# EAGLE board KombyPiMini (EAGLE 7.2.0)
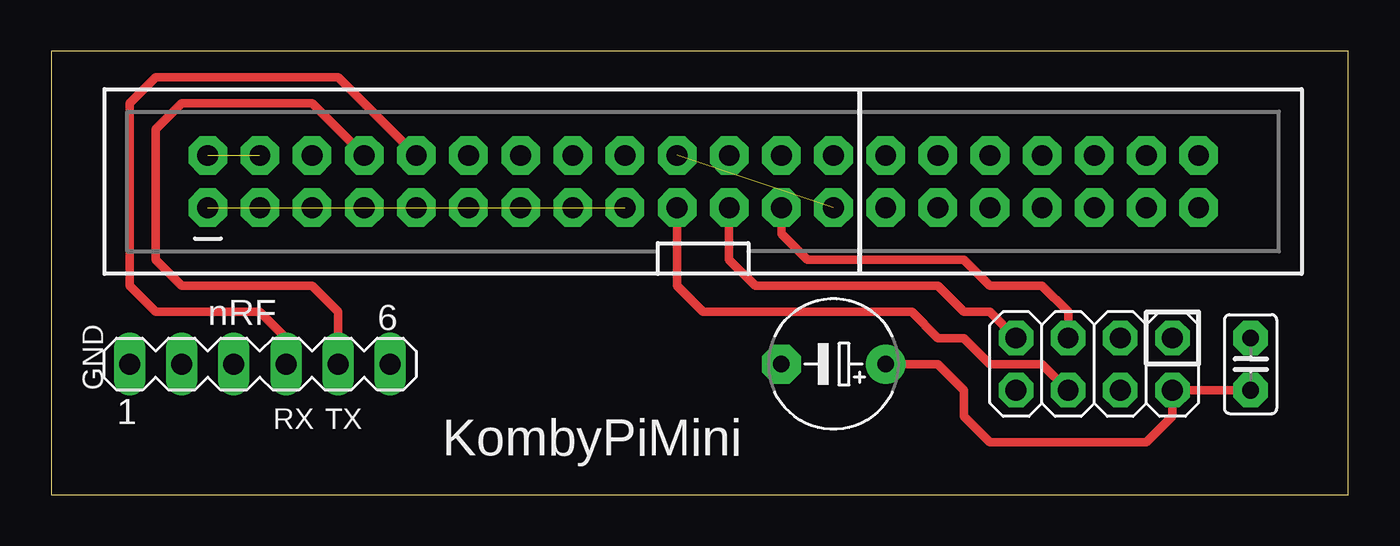
[diagram p0: board, top side]
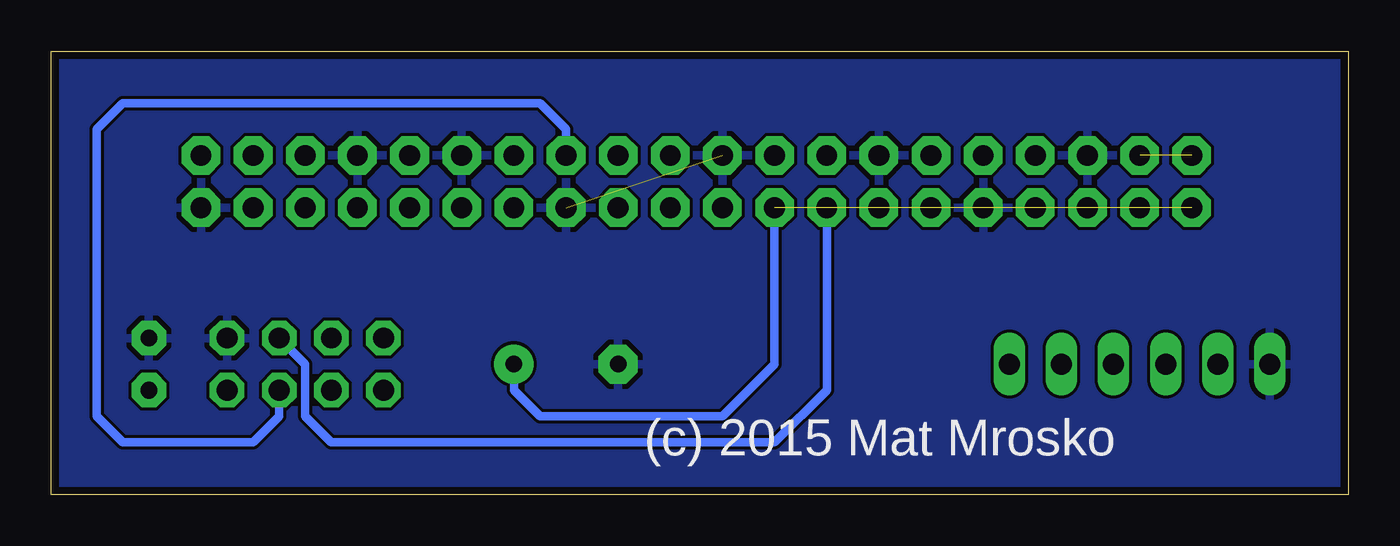
[diagram p1: board, bottom side, seen from below]

Size 63.17 x 21.58 mm. Coordinates in mm from the lower left corner, seen from the top.
Outline: 0,0 63.17,0 63.17,21.58 0,21.58 0,0
Copper layers (1*16): Top 0.0356mm / dielectric 1.5011mm / Bottom 0.0356mm
Design rules "oshpark": minimum track width 6mil, minimum drill 13mil, track to track 6mil, track to pad 6mil, pad to pad 6mil, via to via 6mil, smd to smd 6mil, copper to edge 15mil, drill to drill 6mil, minimum pad ring 7mil, minimum via ring 7mil, stop-mask expansion 4mil, vias tented up to drill 0mil, thermal gap 10mil
Net classes: 1 RFBoard: width 0.406 mm

## Footprints (pad centres in the part's own frame; a part is rotated, then mirrored left to right if it is on the bottom)
C025-025X050 = drill 0.813 pad 1.676 octagon: 1 -1.27,0; 2 1.27,0
E5-6 = drill 0.813 pad 1.905: + -2.54,0 | drill 0.813 pad 1.905 octagon: - 2.54,0
MA06-1 = drill 1.016 long: 1 -6.35,0; 2 -3.81,0; 3 -1.27,0; 4 1.27,0; 5 3.81,0; 6 6.35,0
2X20-SHROUDED = drill 1.016 pad 1.88 octagon: 1 -1.27,24.13; 2 1.27,24.13; 3 -1.27,21.59; 4 1.27,21.59; 5 -1.27,19.05; 6 1.27,19.05; 7 -1.27,16.51; 8 1.27,16.51; 9 -1.27,13.97; 10 1.27,13.97; 11 -1.27,11.43; 12 1.27,11.43; 13 -1.27,8.89; 14 1.27,8.89; 15 -1.27,6.35; 16 1.27,6.35; 17 -1.27,3.81; 18 1.27,3.81; 19 -1.27,1.27; 20 1.27,1.27; 21 -1.27,-1.27; 22 1.27,-1.27; 23 -1.27,-3.81; 24 1.27,-3.81; 25 -1.27,-6.35; 26 1.27,-6.35; 27 -1.27,-8.89; 28 1.27,-8.89; 29 -1.27,-11.43; 30 1.27,-11.43; 31 -1.27,-13.97; 32 1.27,-13.97; 33 -1.27,-16.51; 34 1.27,-16.51; 35 -1.27,-19.05; 36 1.27,-19.05; 37 -1.27,-21.59; 38 1.27,-21.59; 39 -1.27,-24.13; 40 1.27,-24.13
2X04 = drill 1.016 pad 1.676 octagon: 1 -3.81,-1.27; 2 -3.81,1.27; 3 -1.27,-1.27; 4 -1.27,1.27; 5 1.27,-1.27; 6 1.27,1.27; 7 3.81,-1.27; 8 3.81,1.27

## Placement (x,y rotation side)
C1  0.1uF  [C025-025X050]  58.42,6.35 90 top
C2  100uF  [E5-6]  38.1,6.35 180 top
FTDI  [MA06-1]  10.16,6.35 0 top
JP2  RASPBERRYPI-B+-GPIO  [2X20-SHROUDED]  31.75,15.24 90 top
JP4  [2X04]  50.8,6.35 180 top

## Library data of the parts
C1 JP4 = adafruit
C2 = rcl
FTDI = con-lstb; OC_FARNELL: unknown; OC_NEWARK: unknown
JP2 = SparkFun-Boards

## Nets
3.3V [RFBoard]: C1.1 C2.+ JP2.1 JP2.17 JP4.2
CE0: JP2.24
CE1 [RFBoard]: JP2.26 JP4.4
CTS: FTDI.2
FTDI_VCC: FTDI.3
GND: C1.2 C2.- FTDI.1 JP2.6 JP2.9 JP2.14 JP2.20 JP2.25 JP2.30 JP2.34 JP2.39 JP4.1
MISO [RFBoard]: JP2.21 JP4.7
MOSI [RFBoard]: JP2.19 JP4.6
RF_CE [RFBoard]: JP2.15 JP4.3
RTS: FTDI.6
RXI: FTDI.4 JP2.10
SCL: JP2.5
SCLK: JP2.23 JP4.5
SDA: JP2.3
TXO: FTDI.5 JP2.8
VCC: JP2.2 JP2.4

## Tracks (layer width: path | path; a pad name or v marks a point on that pad's centre or on a via)
3.3V  (1 unrouted)
  Top 0.406: C1.1 JP4.2 54.61,3.81 53.34,2.54 45.72,2.54 44.45,3.81 44.45,5.08 43.18,6.35 C2.+
  Bottom 0.406: JP2.17 27.94,6.35 30.48,3.81 39.37,3.81 40.64,5.08 C2.+
CE1
  Bottom 0.406: JP4.4 52.07,3.81 53.34,2.54 59.69,2.54 60.96,3.81 60.96,17.78 59.69,19.05 39.37,19.05 38.1,17.78 JP2.26
GND  (1 unrouted)
  pour Bottom: 0,21.59 0,0 63.5,0 63.5,21.59
MISO
  Top 0.406: JP4.7 45.72,8.89 44.45,8.89 43.18,10.16 34.29,10.16 33.02,11.43 JP2.21
MOSI
  Top 0.406: JP4.6 48.26,6.35 45.72,6.35 44.45,7.62 43.18,7.62 41.91,8.89 31.75,8.89 30.48,10.16 JP2.19
RF_CE
  Bottom 0.406: JP2.15 25.4,5.08 27.94,2.54 49.53,2.54 50.8,3.81 50.8,6.35 JP4.3
RXI
  Top 0.406: JP2.10 13.97,20.32 5.08,20.32 3.81,19.05 3.81,10.16 5.08,8.89 10.16,8.89 11.43,7.62 FTDI.4
SCLK
  Top 0.406: JP4.5 49.53,8.89 48.26,10.16 45.72,10.16 44.45,11.43 36.83,11.43 35.56,12.7 JP2.23
TXO
  Top 0.406: JP2.8 12.7,19.05 6.35,19.05 5.08,17.78 5.08,11.43 6.35,10.16 12.7,10.16 13.97,8.89 FTDI.5
VCC  (1 unrouted)

## Text on the board
tNames: nRF | GND | RX | TX | KombyPiMini
bNames: (c) 2015 Mat Mrosko